# Altium PCB PCB2.PcbDoc
Units mm, origin at the board's own origin, x right, y up, seen from the top; angles counter-clockwise.
Board outline 67.95 x 44.58 mm, 2 copper layers (Top Layer, Bottom Layer); 20 components, 38 nets, 113 pads, 0 vias.
Unrouted connection lines stored in the file: 14.
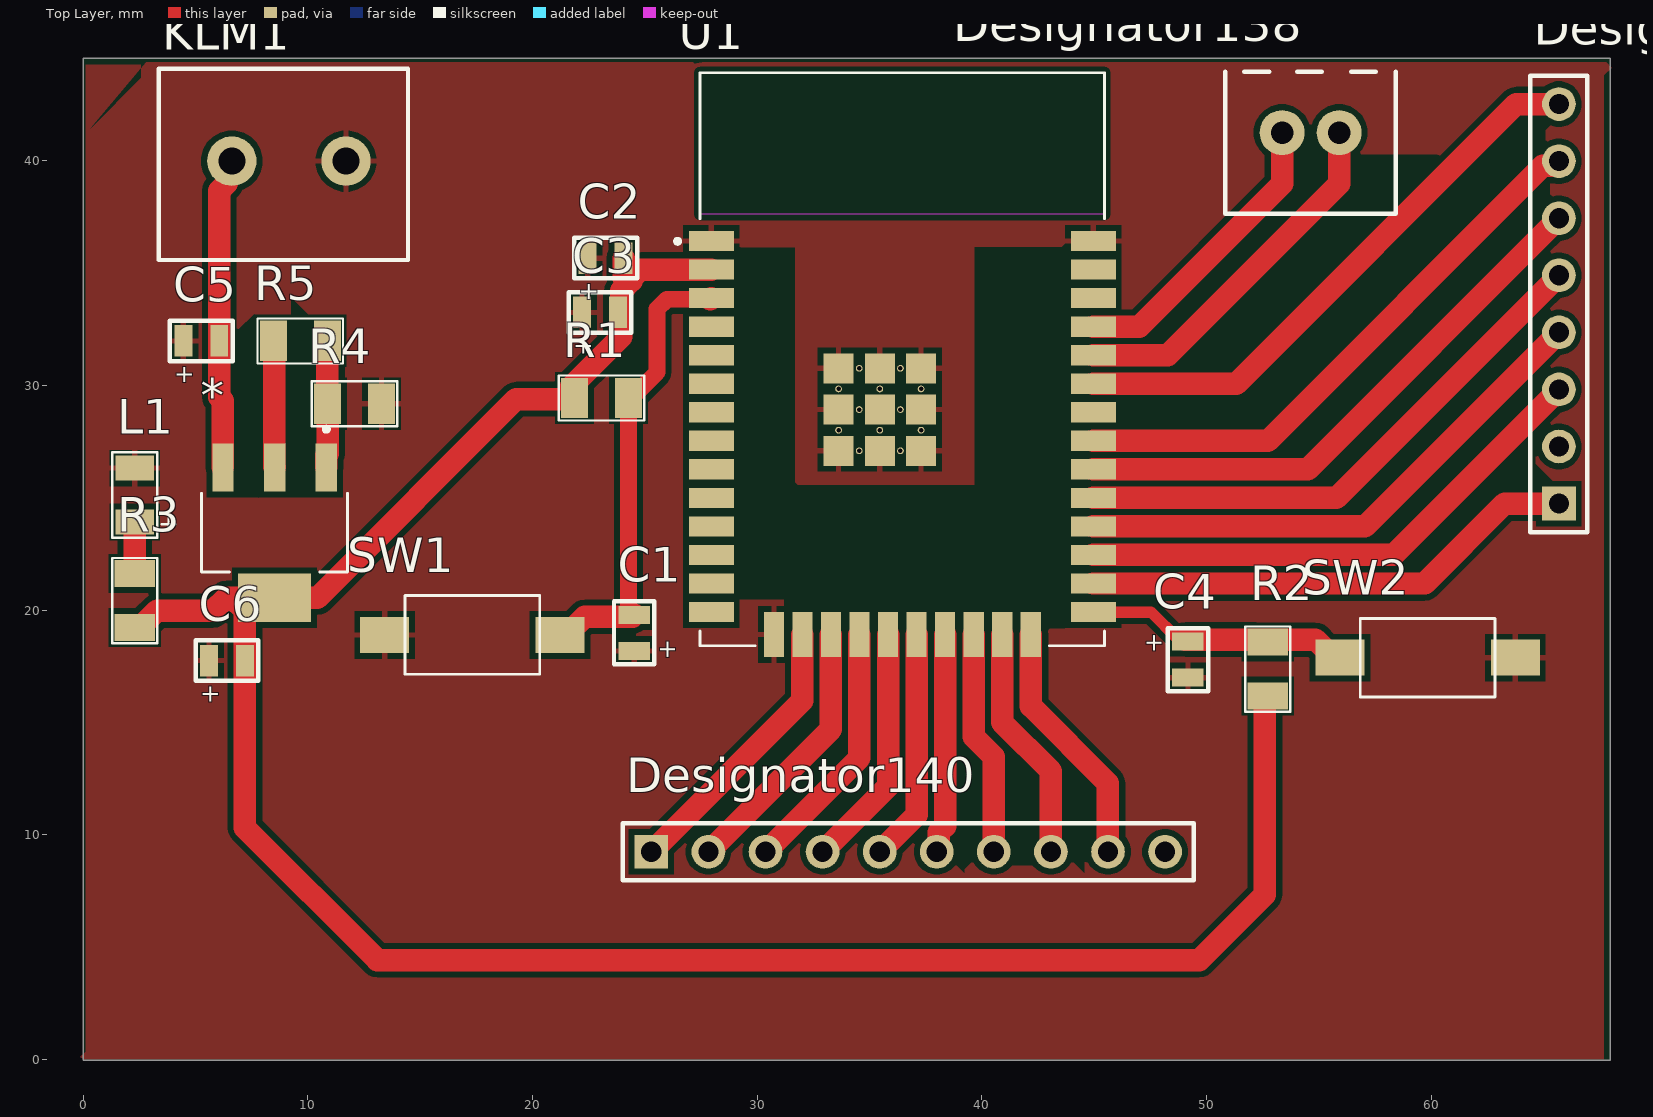
[diagram p0: Top Layer view]
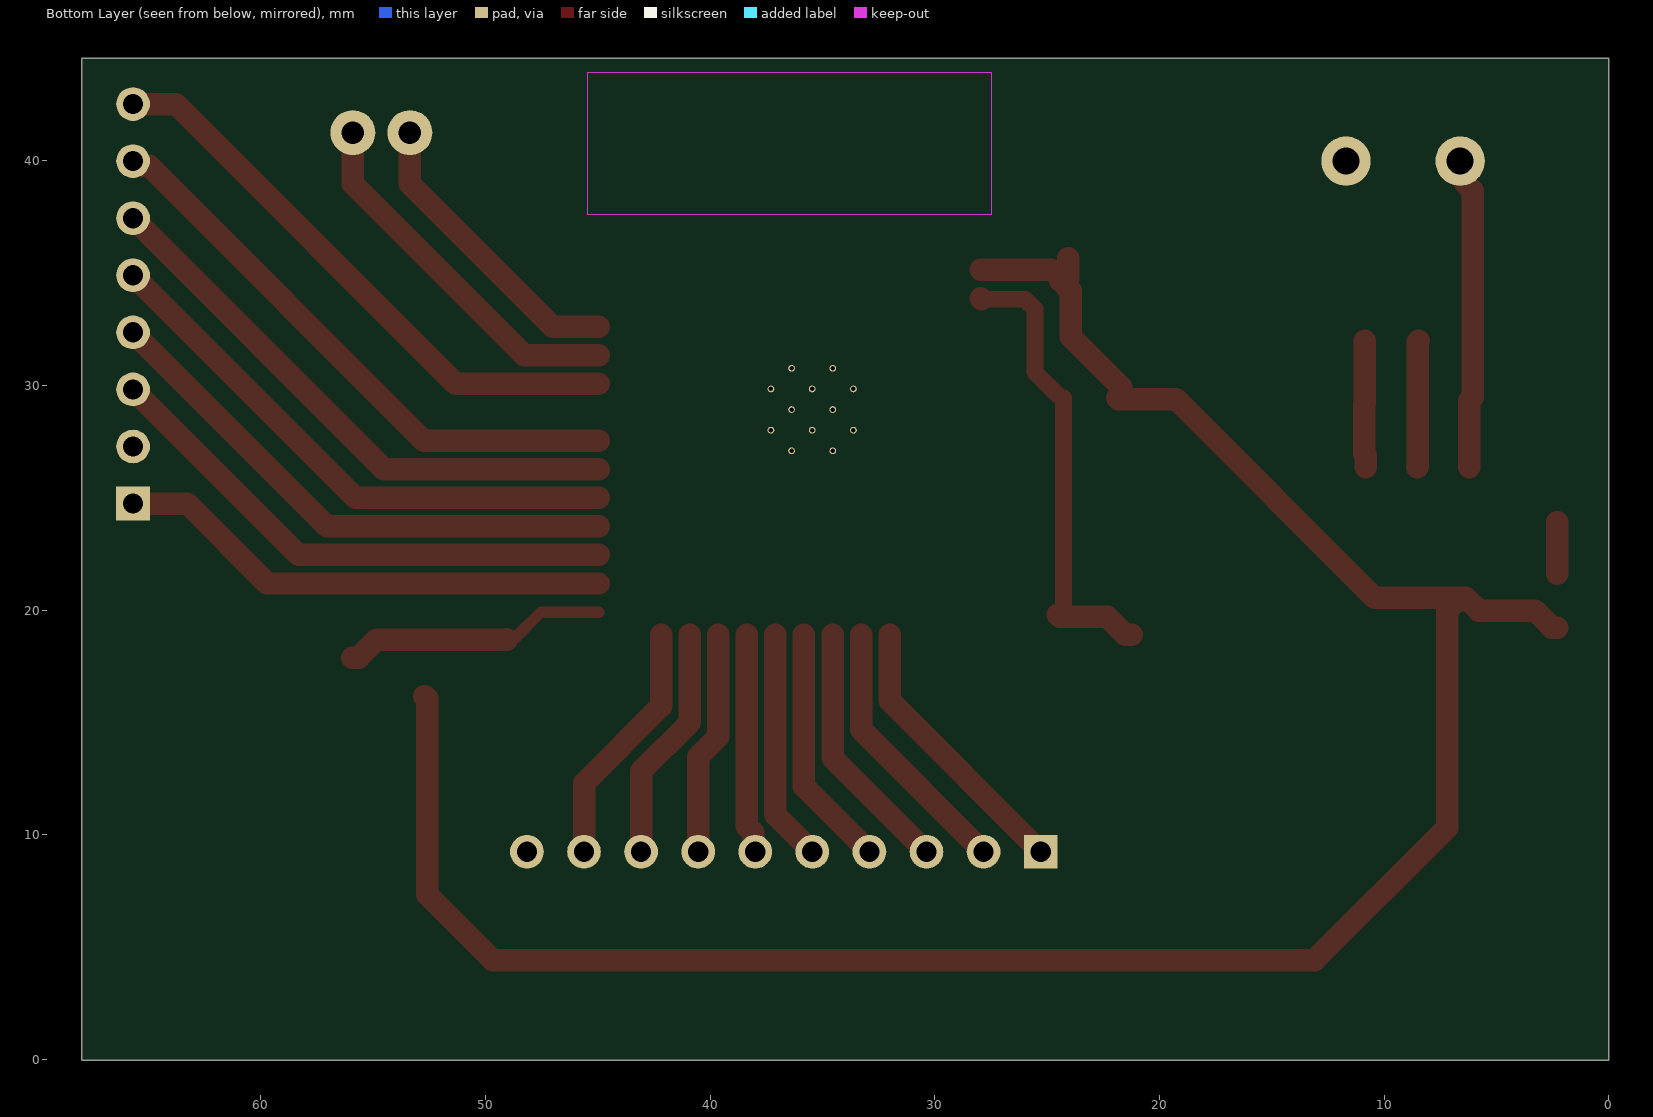
[diagram p1: Bottom Layer view, seen from below]
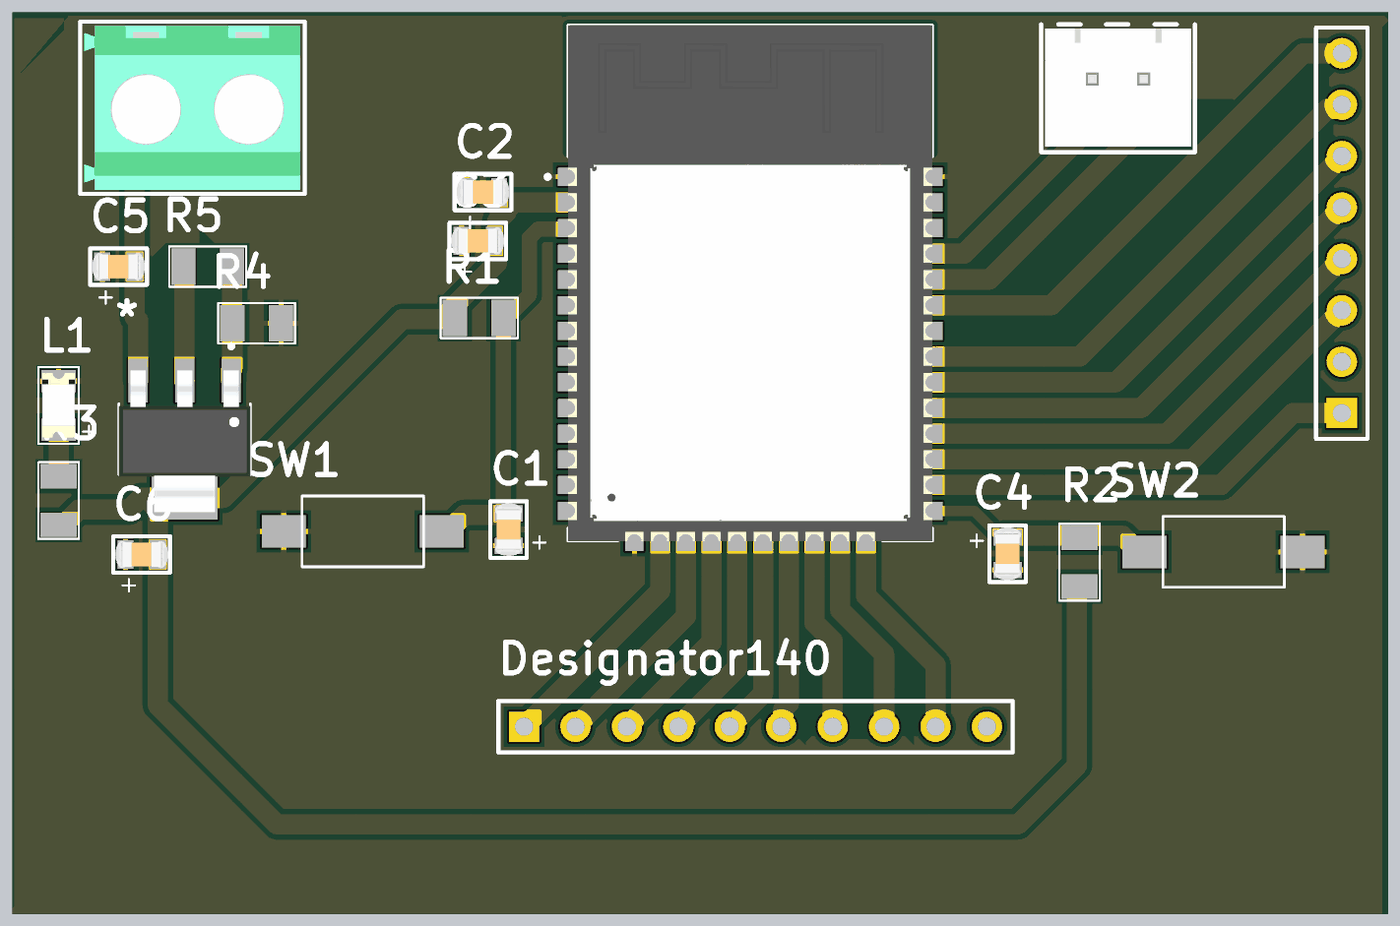
[diagram p2: 3D render of the assembled board from above, using the file's embedded part models]

## Layer stack, top to bottom
Top Solder: solder mask 0.0102, Solder Resist, Dk 3.5
Top Layer: signal copper 0.0356
Dielectric 1: dielectric 0.32, FR-4, Dk 4.8
Bottom Layer: signal copper 0.0356
Bottom Solder: solder mask 0.0102, Solder Resist, Dk 3.5

## Board outline
0.015,-0.029 0.015,44.548 67.96,44.548 67.96,-0.029

## Design rules (kind name [scope] priority, off if disabled: settings)
Clearance [All] p1: gap=0.254 ignorepadtopadclearanceinfootprint=FALSE except(0: Arc-Hole Track-Hole SMDPad-Hole THPad-Hole Via-Hole Fill-Hole Poly-Hole Region-Hole Text-Hole)
PolygonConnect [All] p1: connectstyle=Relief reliefconductorwidth=0.254 reliefentries=4 polygonreliefangle="90 Angle" airgapwidth=0.254
RoutingVias [All] p1: holewidth=0.711 width=1.27 viastyle="Through Hole" minholewidth=0.711 minwidth=1.27 maxholewidth=0.711 maxwidth=1.27
SolderMaskExpansion [All] p1: expansion=0.102 istentingtop=FALSE
Width [All] p1: maxlimit=1.5 minlimit=0.254 preferedwidth=0.254
30 further rules are at their usual default settings.

## Classes and differential pairs
component class Sheet1: * C1 C2 C3 C4 C5 C6 KLM1 L1 R1 R2 R3 R4 R5 SW1 SW2 U1

## Components (designator, comment, footprint, x,y, rotation, side; value= is the part's Value field where it differs from the comment)
* "LM317DCYR" SOT230P700X180-4N 8.524,23.445 r270 top
C1 "CAP 0.1uF" CAP_805 24.526,18.983 r90 top
C2 "CAP 0.1uF" CAP_805 23.256,35.658 r0 top
C3 "CAP 0.1uF" CAP_805 23.002,33.245 r0 top
C4 "CAP 0.1uF" CAP_805 49.164,17.789 r270 top
C5 "CAP 100nF 0805" CAP_805 5.26,31.975 r0 top
C6 "CAP 100nF 0805" CAP_805 6.403,17.751 r0 top
Designator138 "Comment" "2 PIN 2.54MM" 54.625,41.246 r180 top
Designator139 "Comment" HDR1X8 65.674,24.736 r90 top
Designator140 "Comment" HDR1X10 25.288,9.242 r0 top
KLM1 "2 Pin Klemens" "5.08mm-2 pin" 9.159,39.976 r0 top
L1 "Led Blue" "Led 1206" 2.301,25.117 r90 top
R1 "RES 10K 1206" RES_1206 23.072,29.435 r180 top
R2 "RES 10K 1206" RES_1206 52.72,17.37 r270 top
R3 "RES 220R 1206" RES_1206 2.301,20.418 r270 top
R4 "RES 470R 1206" RES_1206 12.08,29.181 r0 top
R5 "RES 470R 1206" RES_1206 9.667,31.975 r0 top
SW1 "1437566-3" SW_1437566-3 17.324,18.894 r0 top
SW2 "1437566-3" SW_1437566-3 59.832,17.878 r0 top
U1 "ESP32-WROOM-32D" MODULE_ESP32-WROOM-32D 36.455,31.16 r0 top

## Footprints (in the part's own frame and the unit in brackets; to place one, negate y for a bottom-side part, rotate by r counter-clockwise, add the part's x,y. Pads: shape width x height; smd on the part's side, far side on the other; paste and mask are expansions set on the pad)
"2 PIN 2.54MM" [mm]
  round 2 hole 1 mask+0.05: 1(-1.27,0) 2(1.27,0)
  silkscreen extent -3.79,-2.7 3.8,3.62, body extent -3.61,-2.49 3.61,3.35, height 7.21
"5.08mm-2 pin" [mm]
  round 2.2 hole 1.2 mask+0.05: 1(-2.54,0) 2(2.54,0)
  silkscreen extent -5.8,-4.4 5.3,4.1, body extent -5.59,-4.2 5.07,3.9, height 10.2
CAP_805 [mm]
  rect 0.8x1.4 smd mask+0.05: 1(-0.8,0) 2(0.8,0)
  silkscreen extent -1.4,-0.9 1.4,0.9, body extent -1.3,-0.68 1.3,0.68, height 0.9
HDR1X8 [mm] "Connector; Header; 8 Position"
  rect 1.5x1.5 hole 0.9: 1(0,0)
  round 1.5 hole 0.9: 2(2.54,0) 3(5.08,0) 4(7.62,0) 5(10.16,0) 6(12.7,0) 7(15.24,0) 8(17.78,0)
  silkscreen extent -1.27,-1.27 19.05,1.27
HDR1X10 [mm] "Connector; Header; 10 Position"
  rect 1.5x1.5 hole 0.9: 1(0,0)
  round 1.5 hole 0.9: 2(2.54,0) 3(5.08,0) 4(7.62,0) 5(10.16,0) 6(12.7,0) 7(15.24,0) 8(17.78,0) 9(20.32,0) 10(22.86,0)
  silkscreen extent -1.27,-1.27 24.13,1.27
"Led 1206" [mm]
  rect 1.1x1.7 smd mask+0.05: 1(-1.2,0) 2(1.2,0)
  silkscreen extent -1.9,-1.8 1.9,1, body extent -1.59,-0.8 1.61,0.8, height 1.1
MODULE_ESP32-WROOM-32D [mm]
  rect 2x0.9 smd: 1(-8.5,5.26) 2(-8.5,3.99) 3(-8.5,2.72) 4(-8.5,1.45) 5(-8.5,0.18) 6(-8.5,-1.09) 7(-8.5,-2.36) 8(-8.5,-3.63) 9(-8.5,-4.9) 10(-8.5,-6.17) 11(-8.5,-7.44) 12(-8.5,-8.71) 13(-8.5,-9.98) 14(-8.5,-11.25) 25(8.5,-11.25) 26(8.5,-9.98) 27(8.5,-8.71) 28(8.5,-7.44) 29(8.5,-6.17) 30(8.5,-4.9) 31(8.5,-3.63) 32(8.5,-2.36) 33(8.5,-1.09) 34(8.5,0.18) 35(8.5,1.45) 36(8.5,2.72) 37(8.5,3.99) 38(8.5,5.26)
  rect 0.9x2 smd: 15(-5.715,-12.25) 16(-4.445,-12.25) 17(-3.175,-12.25) 18(-1.905,-12.25) 19(-0.635,-12.25) 20(0.635,-12.25) 21(1.905,-12.25) 22(3.175,-12.25) 23(4.445,-12.25) 24(5.715,-12.25)
  rect 1.33x1.33 smd: 39_1(-2.835,-0.405) 39_2(-1,-0.405) 39_3(0.835,-0.405) 39_4(-2.835,-2.24) 39_5(-1,-2.24) 39_6(0.835,-2.24) 39_7(-2.835,-4.075) 39_8(-1,-4.075) 39_9(0.835,-4.075)
  round 0.3 hole 0.2: 39_10(-1.917,-0.405) 39_11(-0.082,-0.405) 39_12(-2.835,-1.322) 39_13(-1,-1.322) 39_14(0.835,-1.322) 39_15(-1.917,-2.24) 39_16(-0.082,-2.24) 39_17(-2.835,-3.157) 39_18(-1,-3.157) 39_19(0.835,-3.157) 39_20(-1.917,-4.075) 39_21(-0.082,-4.075)
  Keep-Out Layer region: 9,6.45 -9,6.45 -9,12.75 9,12.75
  silkscreen extent -10.1,-12.75 9,12.75, body extent -9,-12.75 9,12.75, height 3.25
RES_1206 [mm]
  rect 1.2x1.8 smd mask+0.05: 1(-1.2,0) 2(1.2,0)
  silkscreen extent -1.9,-1 1.9,1, body extent -1.57,-0.82 1.57,0.82, height 0.53
SOT230P700X180-4N [mm]
  rect 2.15x0.95 smd: 1(-2.9,2.3) 2(-2.9,0) 3(-2.9,-2.3)
  rect 2.15x3.25 smd: 4(2.9,0)
  silkscreen extent -4.7,-3.25 1.75,3.25, body extent -3.4,-3.25 3.6,3.25, height 1.8
SW_1437566-3 [mm]
  rect 2.18x1.6 smd: 1(-3.9,0) 2(3.9,0)
  silkscreen extent -3,-1.75 3,1.75

## Part data
C1 C2 C3 C4: library part "CAP 1uF", "0805 smd"
C5 C6: "0805 smd"
KLM1: "5.08mm 2 pin klemens"
SW1 SW2: "Switch Tactile OFF (ON) SPST Rectangular Button Gull Wing 0.05A 12VDC SMD Loose Piece", Package=None, Availability=Unavailable, MP=1437566-3, Price=None
U1: "Bluetooth, WiFi 802.11b/g/n, Bluetooth v4.2 +EDR, Class 1, 2 and 3 Transceiver Module 2.4GHz ~ 2.5GHz Integrated", Package="Module Espressif Systems", Availability="In Stock", Check_prices=https://www.snapeda.com/parts/ESP32-WROOM-32D/Espressif+Systems/view-part/?ref=eda, MF="Espressif Systems", MP=ESP32-WROOM-32D, Price=None, Purchase-URL=https://pricing.snapeda.com/search/part/ESP32-WROOM-32D/?ref=eda, SnapEDA_Link=https://www.snapeda.com/parts/ESP32-WROOM-32D/Espressif+Systems/view-part/?ref=snap

## Nets (pads, with @x,y where several pads share a name; then routed paths per layer and width w, separated by ;. In a path a pad name is that pad's centre, name@x,y a point inside that pad or via, vN(x,y) a via of type N, cw(c..) or ccw(c..) an arc to the next point about the centre after c; other vN are vias at no path point)
+12V: *.3 C5.2 KLM1.1 | length 13.9
  Top Layer w1: *.3 6.224,29.316 6.06,29.479 C5.2 6.06,38.655 6.389,38.984 6.389,39.746 KLM1.1
EN: C1.2 R1.1 SW1.2 U1.3 | length 20.4
  Top Layer w0.75: R1.1 24.272,19.808 24.297,19.783 C1.2 ; R1.1@24.526,29.562 25.542,30.578 25.542,33.391 25.981,33.83 U1.3@27.905,33.83
  Top Layer w1: SW1.2 21.514,18.894 22.326,19.706 24.449,19.706 C1.2 ; U1.3@27.905,33.83 U1.3
GND: C1.1 C2.1 C3.1 C4.2 C5.1 C6.1 KLM1.2 L1.2 R4.2 SW1.1 SW2.2 U1.1 U1.15 U1.38 U1.39_1 U1.39_2 U1.39_3 U1.39_4 U1.39_5 U1.39_6 U1.39_7 U1.39_8 U1.39_9 U1.39_10 U1.39_11 U1.39_12 U1.39_13 U1.39_14 U1.39_15 U1.39_16 U1.39_17 U1.39_18 U1.39_19 U1.39_20 U1.39_21
IO0: C4.1 R2.1 SW2.1 U1.25 | length 11.8
  Top Layer w0.508: U1.25 47.524,19.91 48.737,18.697 C4.1@49.037,18.697
  Top Layer w1: C4.1@49.037,18.697 49.047,18.687 52.203,18.687 52.212,18.678 54.842,18.678 55.642,17.878 SW2.1
"LED REG": *.2 *.4 C2.2 C3.2 C6.2 R1.2 R2.2 R3.2 R5.1 U1.2 | length 108.5
  Top Layer w1: R3.2 2.542,19.218 3.294,19.97 5.79,19.97 6.365,20.545 6.628,20.545 ; R5.1 8.499,31.943 8.499,26.37 *.2 ; R1.2@21.698,29.909 23.956,32.167 23.956,34.199 24.413,34.656 24.413,34.75 24.813,35.15 U1.2 ; R1.2 21.825,29.388 19.272,29.388 10.429,20.545 *.4 6.628,20.545 ; 24.056,34.75 C2.2 ; R2.2 52.693,16.17 52.593,16.07 52.593,7.337 49.672,4.416 13.096,4.416 7.203,10.309 C6.2 7.203,19.97 6.628,20.545
Net*_1: *.1 R4.1 R5.2 | length 5.7
  Top Layer w1: *.1 10.824,26.895 10.88,26.951 R4.1 10.874,29.188 10.874,31.969 R5.2
NetL1_1: L1.1 R3.1 | length 2.3
  Top Layer w1: R3.1 L1.1
NetP1_2: Designator140.9 U1.24 | length 11.1
  Top Layer w1: U1.24 42.179,18.901 42.179,15.719 45.608,12.29 Designator140.9
NetP1_3: Designator139.1 U1.26 | length 22.2
  Top Layer w1: U1.26 59.705,21.18 63.261,24.736 Designator139.1
NetP1_4: Designator139.5 U1.29 | length 24.8
  Top Layer w1: U1.29 55.768,24.99 Designator139.5
NetP1_5: U1.14
NetP1_6: Designator140.1 U1.16 | length 12.5
  Top Layer w1: Designator140.1 32.01,15.964 U1.16
NetP1_7: U1.13
NetP1_8: Designator140.8 U1.23 | length 10.6
  Top Layer w1: U1.23 40.9,15.003 43.068,12.835 Designator140.8
NetP1_9: Designator139.3 U1.27 | length 23.8
  Top Layer w1: U1.27 58.308,22.45 Designator139.3
NetP1_10: Designator139.4 U1.28 | length 24.3
  Top Layer w1: U1.28 57.038,23.72 Designator139.4
NetP1_11: Designator139.6 U1.30 | length 25.3
  Top Layer w1: U1.30 54.498,26.26 Designator139.6
NetP1_12: Designator139.7 U1.31 | length 25.9
  Top Layer w1: U1.31 52.72,27.53 64.952,39.762 65.46,39.762 Designator139.7
NetP1_13: Designator139.8 U1.33 | length 25.9
  Top Layer w1: U1.33 51.323,30.07 63.769,42.516 Designator139.8
NetP1_14: U1.36
NetP1_15: U1.37
NetP1_16: U1.10
NetP1_17: U1.11
NetP1_18: U1.12
NetP1_19: U1.8
NetP1_20: U1.9
NetP2_1: Designator140.3 U1.18 | length 11.4
  Top Layer w1: Designator140.3 34.55,13.424 U1.18
NetP2_2: Designator140.2 U1.17 | length 11.9
  Top Layer w1: Designator140.2 33.28,14.694 U1.17
NetP2_3: Designator140.7 U1.22 | length 10
  Top Layer w1: U1.22 39.63,14.368 40.528,13.47 Designator140.7
NetP2_4: Designator140.6 U1.21 | length 9.8
  Top Layer w1: Designator140.6 38.084,9.338 38.084,10.104 38.36,10.381 U1.21
NetP2_5: Designator140.5 U1.20 | length 10.3
  Top Layer w1: Designator140.5 37.09,10.884 U1.20
NetP2_6: Designator140.4 U1.19 | length 10.9
  Top Layer w1: Designator140.4 35.82,12.154 U1.19
NetP2_7: U1.7
NetP2_8: U1.6
NetP2_9: U1.5
NetP2_10: U1.4
NetPROG_1: Designator138.1 U1.34 | length 16.4
  Top Layer w1: U1.34 48.275,31.34 55.895,38.96 Designator138.1
NetPROG_2: Designator138.2 U1.35 | length 13.3
  Top Layer w1: U1.35 47.005,32.61 53.355,38.96 Designator138.2
pads on no net: Designator139.2 Designator140.10 U1.32

## Polygon pours and split planes (outlines as drawn)
GND on Top Layer "GND_L01_P000" (solid, remove dead copper, pour order 0): 0.34,41.45 2.57,43.68 2.57,44.37 67.79,44.37 68.02,44.14 67.67,43.79 67.67,0 0,0 -0.12,0.12 0.11,0.35 0.11,44.26 2.69,44.26 2.8,44.37

## Other copper
Top Layer:
  pour cut-out: 7.613,26.35 7.81,26.547 7.81,25.001 7.613,25.198
  pour cut-out: 27.18,44.3 27.29,44.41 45.42,44.41 45.455,44.375 27.582,44.375
  pour cut-out: 9.253,25.016 10.095,25.016 10.095,33.047 9.253,33.889
  pour cut-out: 6.953,29.963 6.882,29.963 6.82,30.025 6.82,32.336 7.59,31.566 7.59,30.671
  pour cut-out: 6.965,25.016 7.795,25.016 7.613,25.198 7.613,33.163 6.82,32.37
  pour cut-out: 43.829,9.901 44.004,9.726 44.004,8.854 44.552,8.306 44.552,9.057 44.93,9.436 44.93,10.01 44.92,10.02 44.92,11.7 43.829,12.791
  pour cut-out: 41.416,13.412 41.341,13.412 41.331,13.402 41.331,9.31 40.66,8.639 42.348,8.639 42.334,8.626 42.334,9.104 42.307,9.131 42.307,10.217 42.53,10.44 42.53,12.297 41.217,13.61
  pour cut-out: 39.121,10.066 38.791,9.736 38.791,8.722 39.207,8.306 39.207,8.469 39.592,8.854 39.592,9.726 39.9,10.034 39.9,11.71 39.92,11.73 39.92,12.89 39.6,13.21 39.4,13.21 39.121,13.489
  pour cut-out: 59.04,21.941 59.39,21.941 62.844,25.395 64.215,25.395 64.53,25.71 65.431,25.71 64.63,26.511 64.63,27.368 64.611,27.388 64.321,27.388 59.39,22.456
  pour cut-out: 65.267,38.104 65.267,39.001 53.403,27.138 53.521,27.021 54.183,27.021
  pour cut-out: 46.209,29.309 46.209,28.291 52.405,28.291 64.894,40.779 65.058,40.779 65.058,41.351 65.286,41.58 65.111,41.755 63.94,41.755 51.494,29.309 46.209,29.309 46.209,28.081 46,28.29
  pour cut-out: 56.665,40.243 56.665,38.691 49.007,31.033 49.007,30.831 50.679,30.831 50.85,30.66 60.27,40.08 60.27,40.27 56.692,40.27
  pour cut-out: 43.701,25.556 39.724,25.556 39.68,25.6 39.68,36.15 43.558,36.15 43.701,36.293
  pour cut-out: 29.209,25.556 31.766,25.556 31.78,25.57 31.67,25.68 31.67,36.12 29.31,36.12 29.209,36.019
  pour cut-out: 31.26,20.42 31.31,20.37 31.31,20.13 42.84,20.13 42.874,20.164 42.874,19.193 43.688,19.193 43.701,19.206 43.61,19.297 43.61,20.66 31.34,20.66 31.2,20.52 31.2,20.13
  pour cut-out: 29.209,20.476 43.701,20.476 43.701,25.556 29.209,25.556

## Text inside footprints (layer, text, board x,y; h text height)
C1: Top Overlay "+" at 26.359,17.783 h0.8 r90
C2: Top Overlay "+" at 22.056,33.825 h0.8
C3: Top Overlay "+" at 21.802,31.412 h0.8
C4: Top Overlay "+" at 47.331,18.989 h0.8 r270
C5: Top Overlay "+" at 4.06,30.142 h0.8
C6: Top Overlay "+" at 5.203,15.918 h0.8
U1: Mechanical 13 "ANTENNA" at 30.455,40.16 h1.78